# Altium PCB OK6410AV2.PcbDoc (part 4 of 4)
Units mm, origin at the board's own origin, x right, y up, seen from the top; angles counter-clockwise.
Board outline 144.31 x 105.28 mm, 4 copper layers (Top, GND, VCC, Bottom), stack 0.899 mm thick; 254 components, 278 nets, 1261 pads, 740 vias.
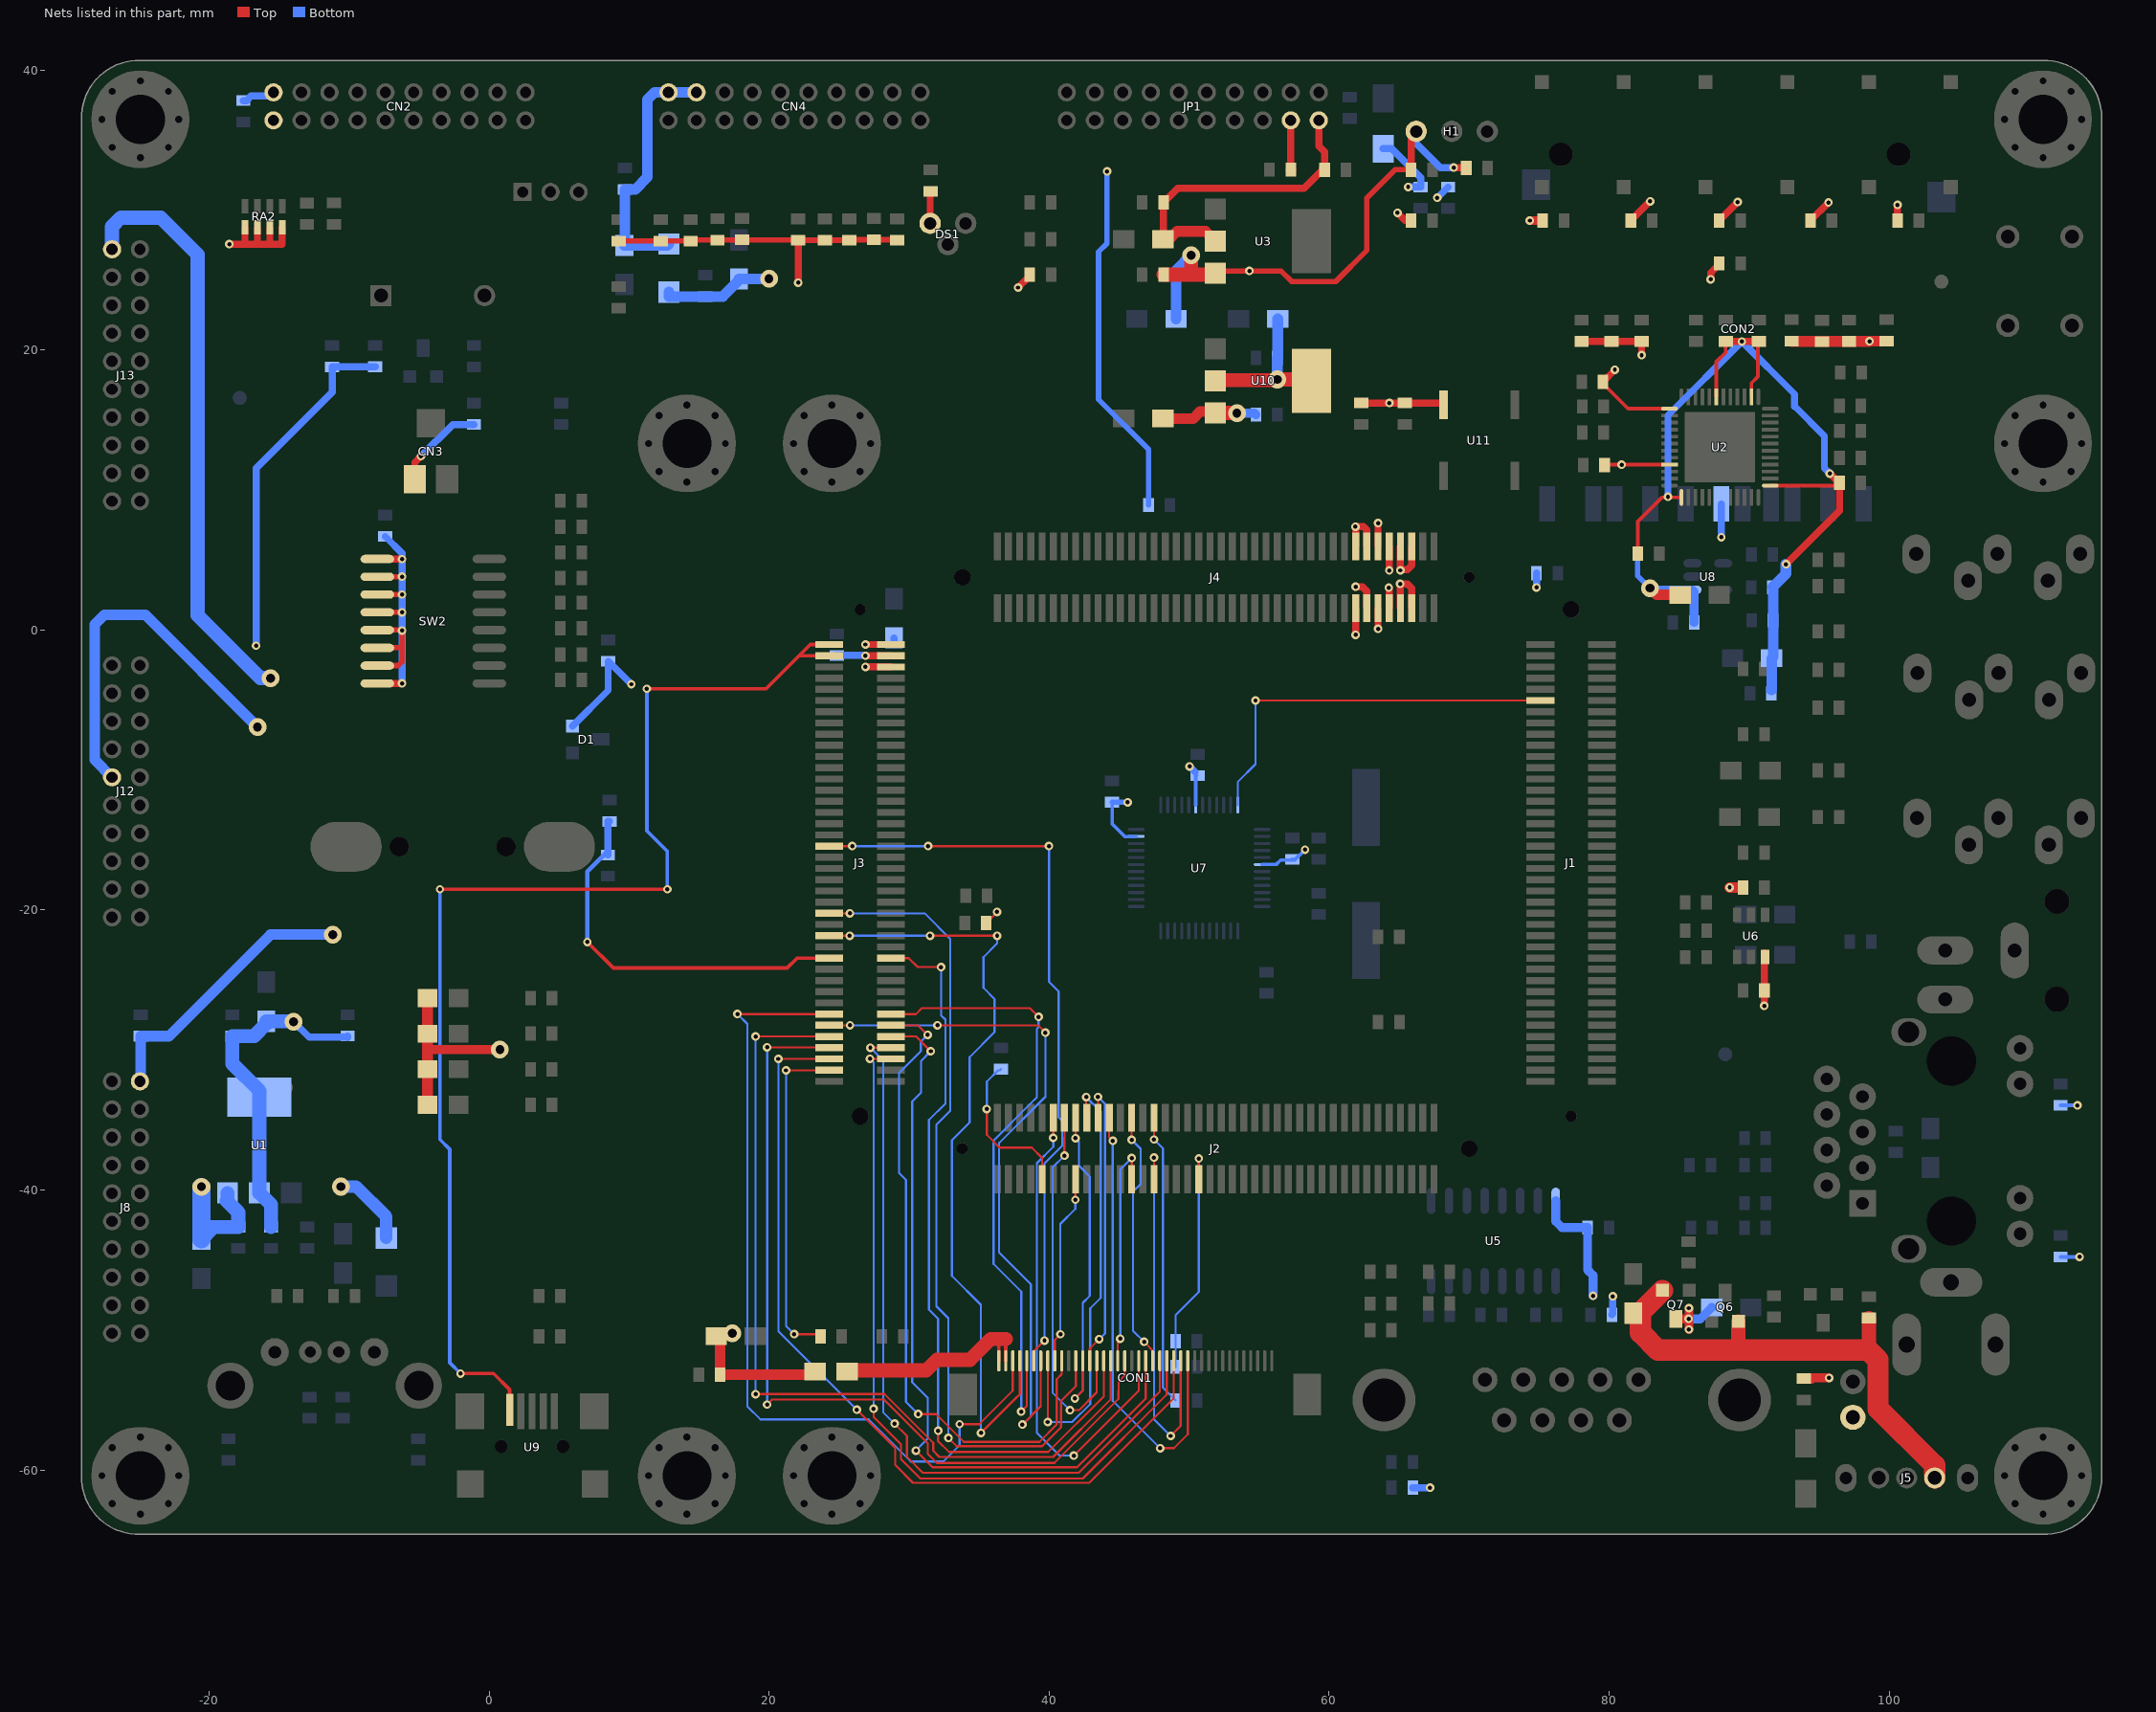
[diagram p6: the nets of this part, all layers, seen from the top]

## Via types
v1: diameter 0.61, hole 0.305, Top to Bottom, tented both sides, 719 vias
v2: diameter 1.27, hole 0.635, Top to Bottom, tented both sides, 21 vias

## Nets (pads, with @x,y where several pads share a name; then routed paths per layer and width w, separated by ;. In a path a pad name is that pad's centre, name@x,y a point inside that pad or via, vN(x,y) a via of type N, cw(c..) or ccw(c..) an arc to the next point about the centre after c; other vN are vias at no path point) (continued)
VBUS: J3.77 J3.79 U9.1 | length 88.4
  Top w0.254: v1(-3.522,-18.512) v1(12.721,-18.512) ; v1(-2.052,-53.111) 0.31,-53.111 1.456,-54.257 U9.1@1.456,-55.809 ; v1(11.258,-4.194) 16.088,-4.194 16.089,-4.195 19.773,-4.195 22.137,-1.831 ; J3.77@24.289,-1.831 22.137,-1.831 ; J3.79@24.289,-1.031 22.937,-1.031 22.137,-1.831
  Bottom w0.254: v1(-3.522,-18.512) -3.522,-36.396 -2.824,-37.094 -2.824,-52.339 v1(-2.052,-53.111) ; v1(11.258,-4.194) 11.258,-14.346 12.721,-15.809 v1(12.721,-18.512)
VCLK: C3.1 J2.43 R66.2 | length 17.1
  Top w0.152: J2.43@50.689,-39.231 v1(50.689,-37.743)
  Bottom w0.152: R66.2@49.037,-52.622 49.037,-50.813 C3.1@49.03,-50.805 49.03,-48.937 50.689,-47.279 v1(50.689,-37.743)
VD0: CON1.3 J3.13 | length 60.6
  Top w0.152: v1(17.734,-27.431) J3.13@24.289,-27.431 ; v1(33.595,-56.725) 35,-56.725 37.396,-54.329 CON1.3@37.396,-52.199
  Bottom w0.152: v1(17.734,-27.431) 18.44,-28.137 18.44,-55.457 19.372,-56.39 27.111,-56.39 30.111,-59.389 32.438,-59.389 33.595,-58.232 v1(33.595,-56.725)
VD1: CON1.4 J3.27 | length 56.7
  Top w0.152: J3.27@24.289,-21.831 25.671,-21.831 v1(25.747,-21.833) ; v1(31.486,-21.833) 36.139,-21.833 v1(36.281,-21.833) ; v1(35.122,-57.357) 37.586,-54.894 37.896,-54.584 CON1.4@37.896,-52.199
  Bottom w0.152: v1(25.747,-21.833) v1(31.486,-21.833) ; v1(35.122,-57.357) 35.122,-48.203 33.045,-46.125 33.045,-36.435 34.307,-35.173 34.307,-30.502 36.095,-28.714 36.095,-26.357 35.299,-25.56 35.299,-23.366 36.281,-22.384 v1(36.281,-21.833)
VD2: CON1.5 J3.14 | length 45.1
  Top w0.152: J3.14@28.689,-27.431 30.478,-27.431 30.903,-27.006 38.619,-27.006 v1(39.24,-27.627) ; v1(38.003,-55.823) 38.396,-55.43 CON1.5@38.396,-52.199
  Bottom w0.152: v1(38.003,-55.823) 38.003,-47.258 36.027,-45.282 36.027,-36.468 38.733,-33.762 39.114,-33.381 39.114,-28.489 39.24,-28.363 v1(39.24,-27.627)
VD3: CON1.6 J3.43 | length 53.7
  Top w0.152: J3.43@24.289,-15.431 v1(25.933,-15.431) ; v1(31.345,-15.431) v1(39.984,-15.431) ; CON1.6@38.896,-52.199 38.896,-51.93 38.913,-51.912 38.913,-51.503 v1(39.663,-50.753)
  Bottom w0.152: v1(25.933,-15.431) v1(31.345,-15.431) ; v1(39.663,-50.753) 39.663,-38.093 40.921,-36.835 40.921,-35.047 40.668,-34.795 40.668,-25.809 39.984,-25.125 v1(39.984,-15.431)
VD4: CON1.7 J3.11 | length 51.3
  Top w0.152: J3.11@24.289,-28.231 v1@25.768,-28.231 ; v1(32.017,-28.23) 39.205,-28.23 v1(39.727,-28.752) ; v1(38.089,-56.758) 39.396,-55.451 CON1.7@39.396,-52.199
  Bottom w0.152: v1(25.769,-28.23) v1(32.017,-28.23) ; v1(38.089,-56.758) 38.684,-56.163 38.684,-46.725 36.425,-44.466 36.425,-36.633 39.727,-33.331 v1(39.727,-28.752)
VD5: CON1.8 J2.64 | length 32.2
  Top w0.152: v1(39.896,-56.572) CON1.8@39.896,-52.199 ; v1(42.642,-33.359) 42.642,-34.831 42.642,-34.878 J2.64@42.689,-34.831
  Bottom w0.152: v1(39.896,-56.572) 41.635,-56.572 42.92,-55.287 42.92,-48.462 43.677,-47.706 43.677,-34.393 v1(42.642,-33.359)
VD6: CON1.9 J2.65 | length 14.2
  Top w0.152: CON1.9@40.396,-52.199 40.396,-50.703 v1(40.798,-50.301) ; v1(41.871,-40.695) 41.871,-39.231 41.871,-38.935 41.889,-38.953 J2.65@41.889,-39.231
  Bottom w0.152: v1(40.798,-50.301) 40.798,-42.425 41.871,-41.351 v1(41.871,-40.695)
VD7: CON1.10 J3.12 | length 47.3
  Top w0.152: J3.12@28.689,-28.231 30.628,-28.231 v1(31.314,-28.917) ; v1(30.639,-56.006) 31.919,-56.006 33.903,-57.989 39.297,-57.989 40.536,-56.75 40.536,-53.511 40.896,-53.151 CON1.10@40.896,-52.199
  Bottom w0.152: v1(30.639,-56.006) 29.765,-55.132 29.765,-39.278 29.27,-38.782 29.27,-31.645 30.834,-30.081 30.834,-29.397 v1(31.314,-28.917)
VD8: CON1.12 J3.31 | length 59.8
  Top w0.152: J3.31@24.289,-20.231 24.785,-20.231 v1(25.762,-20.23) ; v1(32.801,-57.71) 33.39,-58.299 39.494,-58.299 40.842,-56.951 40.842,-55.067 41.896,-54.014 CON1.12@41.896,-52.199
  Bottom w0.152: v1(25.762,-20.23) 31.095,-20.23 32.929,-22.064 32.929,-34.336 31.94,-35.325 31.94,-48.297 32.801,-49.158 v1(32.801,-57.71)
VD9: CON1.13 J2.66 | length 24.4
  Top w0.152: v1(41.833,-54.891) 42.396,-54.328 CON1.13@42.396,-52.199 ; v1(41.881,-36.301) 41.881,-34.831 41.881,-34.54 J2.66@41.889,-34.831
  Bottom w0.152: v1(41.833,-54.891) 42.397,-54.327 42.397,-48.056 42.895,-47.558 42.895,-39.031 42.122,-38.259 42.122,-36.542 v1(41.881,-36.301)
VD10: CON1.14 J2.62 | length 21
  Top w0.152: CON1.14@42.896,-52.199 42.896,-51.33 v1(43.574,-50.652) ; J2.62@43.489,-34.831 v1(43.489,-33.347)
  Bottom w0.152: v1(43.489,-33.347) 43.982,-33.84 43.982,-50.244 v1(43.574,-50.652)
VD11: CON1.15 J2.68 | length 26.5
  Top w0.152: v1(41.088,-37.544) J2.68@41.089,-34.831 J2.68@41.089,-34.831 ; v1(41.485,-55.727) 42.12,-55.727 43.396,-54.451 CON1.15@43.396,-52.199
  Bottom w0.152: v1(41.088,-37.544) 40.237,-38.395 40.237,-54.478 v1(41.485,-55.727)
VD12: CON1.16 J3.24 | length 54.9
  Top w0.152: J3.24@28.689,-23.431 29.958,-23.431 30.601,-24.073 v1(32.272,-24.073) ; v1(32.063,-57.197) 32.063,-57.936 32.844,-58.717 39.925,-58.717 43.896,-54.747 CON1.16@43.896,-52.199
  Bottom w0.152: v1(32.063,-57.197) 32.063,-49.188 31.416,-48.542 31.416,-34.988 32.586,-33.818 32.586,-27.829 32.272,-27.515 v1(32.272,-24.073)
VD13: CON1.17 J3.9 | length 62.8
  Top w0.152: v1(19.023,-54.581) 28.236,-54.581 31.714,-58.058 31.714,-58.627 32.151,-59.064 40.273,-59.064 44.396,-54.942 CON1.17@44.396,-52.199 ; v1(19.023,-29.03) 21.181,-29.03 ; 21.181,-29.031 J3.9@24.289,-29.031
  Bottom w0.152: v1(19.023,-54.581) v1(19.023,-29.03)
VD14: CON1.18 J2.55 | length 16.4
  Top w0.152: CON1.18@44.896,-52.199 44.896,-50.801 v1(45.078,-50.619) ; J2.55@45.889,-39.231 45.898,-39.24 45.898,-39.231 v1(45.898,-37.71)
  Bottom w0.152: v1(45.078,-50.619) 45.078,-38.53 v1(45.898,-37.71)
VD15: CON1.19 J3.7 | length 62.6
  Top w0.152: v1(19.851,-29.803) 24.26,-29.803 J3.7@24.289,-29.831 ; v1(19.853,-55.325) 20.22,-54.958 28.182,-54.958 31.325,-58.102 31.325,-58.838 31.988,-59.501 40.362,-59.501 44.952,-54.911 44.952,-54.359 44.956,-54.355 44.956,-53.68 45.396,-53.24 CON1.19@45.396,-52.199
  Bottom w0.152: v1(19.851,-29.803) 19.767,-29.719 19.853,-29.719 v1(19.853,-55.325)
VD16: CON1.21 J2.70 | length 35
  Top w0.152: v1(40.29,-36.269) J2.70@40.289,-34.831 ; v1(41.759,-58.97) 46.396,-54.334 CON1.21@46.396,-52.199
  Bottom w0.152: v1(40.29,-36.269) 40.29,-36.907 39.118,-38.079 39.118,-57.347 40.741,-58.97 v1(41.759,-58.97)
VD17: CON1.22 J3.10 | length 54.8
  Top w0.152: J3.10@28.689,-29.031 30.483,-29.031 v1(31.535,-30.082) ; v1(30.474,-58.615) 31.665,-59.806 41.993,-59.806 46.896,-54.903 CON1.22@46.896,-52.199
  Bottom w0.152: v1(30.474,-58.615) 31.328,-57.761 31.328,-54.853 30.211,-53.736 30.211,-33.677 30.842,-33.045 30.842,-30.775 v1(31.535,-30.082)
VD18: CON1.23 J2.56 | length 18.4
  Top w0.152: v1(45.888,-36.412) 45.888,-34.832 J2.56@45.889,-34.831 ; v1(46.782,-50.842) 47.396,-51.455 CON1.23@47.396,-52.199
  Bottom w0.152: v1(45.888,-36.412) 46.532,-37.055 46.532,-39.562 45.995,-40.099 45.995,-50.054 v1(46.782,-50.842)
VD19: CON1.24 J3.8 | length 54.9
  Top w0.152: v1@27.222,-29.831 J3.8@28.689,-29.831 ; v1(28.953,-56.687) 29.832,-57.566 29.832,-59.046 30.989,-60.204 42.087,-60.204 47.896,-54.396 CON1.24@47.896,-52.199
  Bottom w0.152: v1(27.222,-29.83) 28.139,-30.747 28.136,-49.226 28.136,-55.871 v1(28.953,-56.687)
VD20: CON1.25 J3.6 | length 55.5
  Top w0.152: v1(27.199,-30.628) 27.199,-30.631 J3.6@28.689,-30.631 ; v1(27.457,-55.625) 27.457,-56.212 29.403,-58.157 29.403,-59.219 30.789,-60.606 42.394,-60.606 48.396,-54.605 CON1.25@48.396,-52.199
  Bottom w0.152: v1(27.199,-30.628) 27.461,-30.89 v1(27.457,-55.625)
VD21: CON1.26 J3.5 | length 61.7
  Top w0.152: v1(20.651,-30.631) J3.5@23.977,-30.631 ; J3.5@23.978,-30.631 J3.5@24.289,-30.631 ; v1(26.257,-55.688) 28.992,-58.424 28.992,-59.634 30.271,-60.913 42.859,-60.913 48.896,-54.876 CON1.26@48.896,-52.199
  Bottom w0.152: v1(20.651,-30.631) 20.651,-50.082 v1(26.257,-55.688)
VD22: CON1.27 J2.51 | length 27.6
  Top w0.152: J2.51@47.489,-39.231 v1@47.489,-37.682 ; v1(48.675,-57.566) 49.396,-56.845 CON1.27@49.396,-52.199
  Bottom w0.152: v1(47.488,-37.682) 47.49,-53.756 47.49,-56.381 v1(48.675,-57.566)
VD23: CON1.28 J2.60 | length 32.7
  Top w0.152: J2.60@44.289,-34.831 44.284,-34.836 44.284,-36.225 v1(44.541,-36.481) ; v1(47.926,-58.439) 48.907,-58.439 49.896,-57.45 CON1.28@49.896,-52.199
  Bottom w0.152: v1(44.541,-36.481) 44.541,-55.054 v1(47.926,-58.439)
VDD5V: B2.1 C4.1 C5.1 C6.1 C7.1 C8.1 C9.1 C10.1 C13.1 C21.1 C23.1 C27.1 C50.1 C52.1 C64.1 C71.1 C73.1 C92.1 C94.1 H1.3 J3.76 J3.78 J3.80 J8.19 J12.12 J13.20 J16.1 Q7.C R2.2 R14.1 R27.2 R40.2 R76.1 U1.1 U3.1 U5.16 U8.1 U10.1 | length 221.9
  Top w0.152: v2(53.41,15.494) v2@53.41,15.523
  Top w0.381: U3.1@51.87,25.494 52.037,25.662 v1(54.302,25.662) 56.563,25.662 57.326,24.898 60.463,24.898 62.693,27.128 62.693,30.878 64.699,32.884 C7.1@65.857,32.884
  Top w0.508: v1(26.875,-2.631) J3.76@28.689,-2.631 ; v1(26.875,-1.831) J3.78@28.689,-1.831 ; v1(26.875,-1.031) J3.80@28.689,-1.031 ; U10.1@51.871,15.523 U10.1@52.18,15.523 ; C7.1@65.857,32.884 65.857,35.266 H1.3@66.217,35.626 ; v1(68.897,33.04) 68.897,33.019 R40.2@69.793,33.019
  Top w0.635: Q7.C@84.76,-49.2 v1@85.7,-49.2 ; v1(85.7,-49.962) v1@85.7,-49.2 ; v1(85.7,-48.438) v1@85.7,-49.2 ; 94.449,-53.509 94.542,-53.416 v1(95.707,-53.416)
  Top w0.762: v2(17.351,-50.227) 16.436,-50.227 C6.1@16.217,-50.446 16.495,-50.724 C94.1@16.495,-53.192 23.219,-53.192 23.219,-53.029 R14.1@23.275,-52.973 ; C71.1@48.115,15.107 50.285,15.107 50.786,15.608 51.785,15.608 U10.1@51.871,15.523 ; v2(82.914,3) 83.399,2.514 C4.1@85.065,2.514
  Top w1.016: C73.1@48.167,25.402 50.14,25.402 ; v2(50.14,26.777) 50.14,25.402 ; U3.1@51.87,25.494 51.87,25.377 51.845,25.402 50.14,25.402 ; U10.1@52.18,15.523 v2@53.41,15.523
  Bottom w0.381: R27.2@82.042,5.461 82.042,3.871 v2(82.914,3)
  Bottom w0.508: J8.19@-24.95,-32.235 J8.19@-24.948,-32.232 ; v1(-16.656,-1.114) -16.656,11.558 -11.223,16.991 C92.1@-11.223,18.805 -8.158,18.805 R2.2@-8.151,18.812 ; C5.1@24.829,-1.808 26.852,-1.808 v1(26.875,-1.831) ; v1(26.875,-1.031) 28.809,-1.031 28.908,-0.933 C8.1@28.908,-0.556 ; H1.3@66.217,35.626 66.217,34.774 67.95,33.04 v1(68.897,33.04) ; C64.1@80.198,-48.908 80.257,-48.849 v1(80.257,-47.586)
  Bottom w0.635: v2(53.41,15.494) 54.667,15.494 C52.1@54.766,15.395 ; U5.16@76.182,-40.767 76.182,-42.231 76.632,-42.681 C9.1@78.461,-42.681 ; C9.1@78.461,-42.682 78.461,-45.704 78.85,-46.092 v1(78.85,-47.553) ; v2(82.914,3) 83.041,2.873 U8.1@85.949,2.873 86.073,2.749 C10.1@86.073,0.545 ; v1(85.674,-49.2) 86.512,-49.2 C27.1@87.325,-48.387
  Bottom w0.762: J12.12@-26.95,-10.517 -28.194,-9.273 -28.194,0.394 -27.5,1.088 -24.573,1.088 v2(-16.559,-6.925) ; J8.19@-24.948,-32.232 -24.898,-32.183 C13.1@-24.898,-29.008 -22.875,-29.008 -15.618,-21.751 v2(-11.174,-21.751) ; C50.1@49.06,22.228 49.06,25.696 v2(50.14,26.777)
  Bottom w0.889: v2(-10.599,-39.755) -10.598,-39.756 -9.507,-39.756 -7.359,-41.904 B2.1@-7.359,-43.421
  Bottom w1.016: J13.20@-26.95,27.205 -26.95,28.828 -26.311,29.466 -23.474,29.466 -20.824,26.816 -20.824,1.045 -16.348,-3.43 v2(-15.627,-3.43) ; C21.1@-20.562,-43.521 -19.788,-42.747 -19.788,-42.642 C23.1@-17.924,-42.642 -17.924,-41.605 -18.738,-40.79 -18.7,-40.752 U1.1@-18.7,-40.213
  Bottom w1.27: v2(-20.565,-39.76) -20.562,-39.763 C21.1@-20.562,-43.521
VDD18V: C51.1 C53.1 C84.1 JP1.19 U3.3 | length 22.9
  Top w0.508: C51.1@48.166,27.92 C53.1@48.166,30.536 ; C53.1@48.166,30.542 C53.1@48.166,30.536 ; JP1.19@59.257,36.144 59.257,34.58 59.676,34.162 59.676,33.016 C84.1@59.676,32.886 ; C84.1@59.614,32.954 58.215,31.555 49.186,31.555 C53.1@48.166,30.536
  Top w0.762: C51.1@48.115,27.92 48.166,27.92 48.529,27.92 48.555,27.894 49.147,28.486 51.164,28.486 U3.3@51.87,27.78 ; C84.1@59.614,32.954 C84.1@59.676,33.016
VDD33V: B1.1 C15.1 C16.1 C17.1 C22.1 C24.1 C54.1 C55.1 C59.1 C81.1 C83.1 C86.1 C90.1 C91.1 C96.1 C97.1 C98.2 C99.2 C100.2 C101.2 C102.2 C103.2 C104.2 CN2.1 CN2.2 CN3.3 CON2.4 D1.2 D3.A DS1.3 JP1.17 LED1.1 LED2.1 LED3.1 LED4.1 R6.2 R12.1 R15.2 R18.2 R19.2 R20.2 R22.2 R23.2 R24.2 R29.2 R30.2 R31.2 R32.2 R33.2 R36.1 R38.2 R47.1 R48.2 R50.2 R51.2 R58.1 R59.1 R61.1 R74.1 R75.1 R77.1 R78.1 R91.2 R92.2 R93.2 R94.2 R95.2 RA2.5 RA2.6 RA2.7 RA2.8 SW2.9 SW2.10 SW2.11 SW2.12 SW2.13 SW2.14 SW2.15 SW2.16 U1.3 U1.4 U2.1 U2.9 U6.6 U7.23 U7.30 U7.42 U11.4 | length 224.4
  Top w0.152: R12.1@35.497,-20.926 35.497,-20.966 v1(36.275,-20.133) ; R50.2@82.314,20.628 R50.2@82.322,20.354
  Top w0.254: C15.1@79.563,17.746 79.519,17.746 79.471,17.698 81.348,15.821 U2.1@84.31,15.821 ; C59.1@79.667,11.782 79.706,11.821 U2.9@84.31,11.821
  Top w0.381: SW2.15@-8,-2.54 -7.992,-2.532 -6.502,-2.532 -6.235,-2.266 -6.235,-1.245 ; SW2.14@-8,-1.27 -7.975,-1.245 -6.235,-1.245 ; SW2.13@-8,0 -6.489,0 v1(-6.235,-0.036) -6.235,-1.245 ; SW2.12@-8,1.27 v1(-6.235,1.27) ; SW2.11@-8,2.54 v1(-6.235,2.54) ; SW2.10@-8,3.81 v1(-6.235,3.81) ; v1@-6.245,5.08 v1(-6.235,5.07) ; R6.2@9.235,27.794 R29.2@12.239,27.794 ; R29.2@12.239,27.795 14.358,27.795 14.372,27.78 14.386,27.767 14.399,27.78 14.48,27.861 R24.2@16.298,27.861 16.316,27.879 R33.2@18.056,27.879 22.193,27.879 R32.2@22.221,27.851 ; R32.2@22.067,27.851 R32.2@22.221,27.851 ; R22.2@29.14,27.853 29.107,27.886 R20.2@27.482,27.886 25.76,27.886 R18.2@25.727,27.853 23.977,27.853 R30.2@23.974,27.851 R32.2@22.221,27.851
  Top w0.508: v1(-18.577,27.576) -17.451,27.576 ; RA2.5@-17.451,28.766 -17.451,27.576 ; RA2.6@-16.562,28.766 -16.562,27.576 ; RA2.7@-15.673,28.766 -15.673,27.576 ; RA2.8@-14.784,28.766 -14.792,28.758 -14.792,27.576 -15.673,27.576 ; SW2.16@-8,-3.81 -6.438,-3.81 -6.433,-3.805 v1(-6.235,-3.805) ; SW2.9@-8,5.08 v1@-6.245,5.08 ; CN3.3@-5.316,10.776 -5.316,11.982 v1(-4.877,12.421) ; R32.2@22.067,27.851 22.067,24.812 v1(22.073,24.812) ; R22.2@29.14,27.853 R22.2@29.171,27.884 ; DS1.3@31.495,29.058 31.495,31.317 C96.1@31.524,31.345 ; v1(37.77,24.469) 38.576,25.274 38.576,25.362 R38.2@38.616,25.403 ; C54.1@57.257,32.889 JP1.17@57.257,36.144 ; R61.1@62.292,16.222 62.289,16.219 v1(64.301,16.219) C81.1@65.409,16.221 68.039,16.221 U11.4@68.169,16.091 ; v1(64.88,29.803) 65.425,29.258 R58.1@65.858,29.258 ; R91.2@78.03,20.627 R92.2@80.168,20.628 ; C15.1@79.563,17.746 v1(80.408,18.591) ; R92.2@80.168,20.628 R50.2@82.314,20.628 ; R74.1@81.555,29.259 v1(82.924,30.628) ; v1(82.322,19.648) R50.2@82.322,20.354 ; v1(87.251,25.053) 87.251,25.526 87.803,26.078 87.803,26.131 C16.1@87.865,26.192 ; R75.1@87.864,29.259 v1(89.182,30.577) ; v1(91.085,-26.847) 91.09,-26.847 C100.2@91.09,-25.739 91.09,-23.047 91.133,-23.09 U6.6@91.133,-23.35 ; R77.1@94.385,29.259 v1(95.67,30.544) ; v1(98.596,20.628) v1@98.617,20.65 ; R78.1@100.605,29.259 v1(100.605,30.369) ; -17.451,27.576 -16.562,27.576 ; -16.562,27.576 -15.673,27.576
  Top w0.635: -4.408,-29.972 v2(0.762,-29.972) ; v1(74.336,29.254) 74.341,29.259 R59.1@75.251,29.259
  Top w0.762: LED4.1@-4.408,-33.909 LED3.1@-4.408,-31.369 -4.408,-29.972 LED2.1@-4.408,-28.829 LED1.1@-4.408,-26.289 ; v1(88.611,-18.386) 88.611,-18.389 R36.1@89.566,-18.389 ; R94.2@93.047,20.627 R95.2@97.141,20.627 v1(98.596,20.628) v1(98.596,20.628) ; v1@98.617,20.65 C102.2@99.833,20.65
  Bottom w0.152: C103.2@50.43,-10.141 50.464,-10.176 50.464,-10.415 50.575,-10.415 C103.2@50.592,-10.398
  Bottom w0.254: C99.2@44.493,-12.297 44.493,-13.845 45.394,-14.745 U7.23@46.214,-14.745 ; U7.30@50.464,-12.495 C103.2@50.464,-10.415 ; U7.42@55.214,-16.745 56.212,-16.745 56.532,-16.425 57.326,-16.425 C104.2@57.331,-16.42 ; C104.2@57.369,-16.382 C104.2@57.331,-16.42 ; v1(58.274,-15.686) 57.54,-16.42 C104.2@57.331,-16.42 ; R47.1@112.247,-44.777 v1(113.606,-44.778) ; R48.2@112.247,-33.952 v1(113.456,-33.952)
  Bottom w0.381: v1(44.13,32.769) 44.13,27.628 43.526,27.023 43.526,16.477 47.102,12.901 R31.2@47.102,8.932 ; C99.2@44.493,-12.297 v1(45.597,-12.297)
  Bottom w0.508: C101.2@-17.574,37.823 -17.338,37.823 -17.017,38.144 CN2.2@-15.413,38.144 ; v2(-13.976,-27.981) -12.873,-29.083 C98.2@-10.12,-29.083 ; C98.2@-10.12,-29.001 C98.2@-10.12,-29.083 ; C86.1@-7.435,6.692 -6.235,5.492 v1(-6.235,5.07) v1(-6.235,3.81) v1(-6.235,2.54) v1(-6.235,-0.036) v1(-6.235,-3.805) ; v1(-4.877,12.421) -2.612,14.685 C83.1@-1.098,14.685 ; D1.2@5.944,-6.858 8.492,-4.31 C90.1@8.492,-2.225 8.506,-2.225 v1(10.147,-3.866) ; v1(50.032,-9.743) C103.2@50.43,-10.141 ; D3.A@63.856,34.388 64.449,34.388 66.537,32.3 C17.1@66.537,31.655 v1(65.642,31.655) ; R15.2@65.976,-61.261 v1(67.203,-61.26) v1(67.203,-61.26) ; v1(67.72,30.893) 67.741,30.893 R19.2@68.495,31.647 ; v1(74.803,3.048) 74.811,3.056 R51.2@74.811,4.075 ; v1(88.011,6.629) CON2.4@88.011,9.017 ; C98.2@-10.12,-29.083 -10.12,-29.098 -10.105,-29.083 C98.2@-10.12,-29.083
  Bottom w0.762: B1.1@12.826,24.147 12.84,24.133 12.84,23.827 C97.1@15.425,23.827 16.676,23.827 C55.1@17.926,25.077 ; C55.1@17.831,25.077 C55.1@17.926,25.077 ; v2(19.98,25.104) 19.953,25.077 C55.1@17.926,25.077
  Bottom w1.016: C24.1@-15.585,-42.642 -15.585,-41.043 U1.3@-16.414,-40.213 U1.4@-16.414,-33.355 -16.414,-32.914 -18.361,-30.968 C91.1@-18.361,-29.007 -16.808,-29.007 -15.922,-28.121 C22.1@-15.922,-27.944 -14.012,-27.944 v2(-13.976,-27.981)
  other v1: 80.899,11.811
VDD_AC97: C11.1 C60.1 C61.1 C62.1 C65.1 C66.1 C68.1 R28.1 U2.13 U2.25 U2.38 U2.43 | length 64.9
  Top w0.254: C60.1@82.05,5.472 82.05,7.755 83.766,9.471 U2.13@85.16,9.471 ; U2.43@87.66,16.671 87.66,19.163 88.313,19.815 88.313,20.592 C65.1@88.341,20.62 ; U2.38@90.16,16.671 90.16,17.656 90.623,18.119 C62.1@90.623,20.62 ; U2.25@91.51,10.321 96.264,10.321 96.386,10.444 C61.1@96.457,10.514
  Top w0.381: C61.1@96.386,10.444 C61.1@96.449,10.381
  Top w0.508: C65.1@88.338,20.622 C65.1@88.341,20.62 90.623,20.62 C62.1@90.705,20.62 ; v1(92.634,4.699) 96.449,8.514 C61.1@96.449,10.381 ; v1(95.758,11.176) 96.42,10.514 C61.1@96.457,10.514
  Bottom w0.508: v1(84.201,9.525) 84.201,15.339 v1(89.482,20.62) 93.256,16.845 93.256,15.989 95.377,13.868 95.377,11.557 v1(95.758,11.176)
  Bottom w0.762: C66.1@91.587,-4.284 91.61,-4.262 91.61,-2.036 91.632,-2.013 91.715,-1.931 91.715,0.693 R28.1@91.715,3.059 ; R28.1@91.688,3.086 92.628,4.026 v1@92.628,4.705
VDD_IO: C72.1 C74.1 J4.65 J4.66 J4.67 J4.68 J4.69 J4.70 J4.71 J4.72 J4.73 J4.74 J4.75 J4.76 U10.3 U10.4 | length 33.7
  Top w0.152: v2@56.258,17.85 56.29,17.809 v2(56.293,17.907) ; U10.4@58.729,17.809 U10.4@58.932,17.611 ; v1(64.254,3.028) v1@64.289,3.028 ; v1(65.07,3.299) v1@65.089,3.299 ; v1(65.09,4.267) v1@65.133,4.311
  Top w0.508: v1(61.885,3.101) 62.372,3.101 62.69,2.784 J4.68@62.69,1.569 ; v1(61.889,-0.34) J4.66@61.89,1.569 ; J4.65@61.895,5.964 J4.65@61.89,5.969 61.89,7.38 v1(61.879,7.391) 62.46,7.391 62.69,7.162 J4.67@62.69,5.969 ; v1(63.49,0.084) J4.70@63.49,1.569 ; J4.69@63.49,5.969 v1(63.49,7.638) ; J4.72@64.29,1.569 v1@64.29,3.028 ; v1(64.29,4.26) J4.71@64.29,5.969 ; J4.74@65.09,1.569 65.09,3.299 65.586,3.299 65.89,2.996 J4.76@65.89,1.569 ; v1(65.09,4.267) J4.73@65.09,5.969 ; v1@65.133,4.311 65.576,4.311 65.89,4.624 J4.75@65.89,5.969
  Top w0.635: U10.3@51.871,17.809 U10.3@52.098,17.85 ; U10.4@58.728,17.907 U10.4@58.729,17.809
  Top w1.016: U10.3@52.098,17.85 v2@56.258,17.85 ; v2(56.293,17.907) U10.4@58.728,17.907
  Bottom w0.762: v2(56.293,17.907) 56.293,19.442 C74.1@56.295,19.444 56.327,19.476 C72.1@56.327,22.229
VDD_LCD: CON1.1 CON1.2 R14.2 | length 15.4
  Top w0.254: CON1.1@36.396,-52.199 36.396,-50.644 ; CON1.2@36.896,-52.199 36.896,-50.644
  Top w1.016: R14.2@25.561,-52.973 25.642,-52.892 31.212,-52.892 31.981,-52.123 34.351,-52.123 35.83,-50.644 36.396,-50.644 36.896,-50.644
VDD_RTC: C34.1 J3.23 R17.1 | length 28
  Top w0.254: v1(7.007,-22.283) 8.866,-24.143 10.113,-24.143 21.279,-24.142 21.99,-23.431 J3.23@24.289,-23.431
  Bottom w0.305: v1(7.007,-22.283) 7.007,-17.244 8.328,-15.923 8.338,-15.923 C34.1@8.475,-16.061
  Bottom w0.508: C34.1@8.475,-16.061 8.475,-13.667 R17.1@8.583,-13.667
VDD_WIFI: B1.2 C25.1 C26.1 CN4.2 CN4.4 | length 18.5
  Bottom w0.762: B1.2@12.826,27.576 12.728,27.478 C25.1@9.651,27.478 9.679,27.506 C26.1@9.679,31.48 10.429,31.48 11.302,32.353 11.302,37.903 11.812,38.412 CN4.2@12.804,38.412 CN4.4@14.804,38.412
VDEN: J3.3 R4.2 | length 24.1
  Top w0.152: v1(21.199,-31.451) 22.712,-31.451 ; v1(21.781,-50.294) 23.504,-50.294 R4.2@23.658,-50.447 ; 22.713,-31.45 J3.3@24.289,-31.45 ; J3.3@24.29,-31.45 J3.3@24.289,-31.431
  Bottom w0.152: v1(21.199,-31.451) 21.199,-49.712 v1(21.781,-50.294)
VIN+: C31.1 J5.1 Q6.E Q7.E R79.1 | length 36
  Top w1.016: 89.23,-51.384 Q6.E@89.23,-49.378 ; 98.566,-51.486 R79.1@98.566,-49.141
  Top w1.524: Q7.E@83.807,-47.168 82.245,-48.73 82.245,-50.19 83.49,-51.435 89.281,-51.435 ; 89.23,-51.384 89.281,-51.435 ; J5.1@103.255,-60.565 103.255,-59.668 99.212,-55.626 99.212,-52.132 98.566,-51.486 98.515,-51.435 89.281,-51.435
VSYNC: J2.52 R64.2 | length 20.9
  Top w0.152: v1@47.489,-36.388 J2.52@47.489,-34.831
  Bottom w0.152: v1(47.488,-36.389) 48.116,-37.016 48.116,-54.118 R64.2@49.037,-55.04
WEN: J1.12 U7.36 | length 28.3
  Top w0.152: v1(54.739,-5.03) 63.544,-5.03 ; 63.545,-5.031 J1.12@75.088,-5.031
  Bottom w0.152: U7.36@53.464,-12.495 53.464,-10.856 54.739,-9.581 v1(54.739,-5.03)
XNRSTOUT: J2.71 R90.1 | length 11.3
  Top w0.152: v1(35.539,-34.215) 35.539,-36.054 36.458,-36.972 38.763,-36.972 39.489,-37.699 J2.71@39.489,-39.231
  Bottom w0.152: v1(35.539,-34.215) 35.539,-32.257 36.347,-31.449 36.471,-31.449 R90.1@36.557,-31.362
pads on no net: BAT1.3 BAT1.4 CN2.17 CN2.19 CN4.10 CN4.12 CN4.14 CN4.16 CN4.17 CN4.19 CON1.41 CON1.42 CON2.3@76.556,33.985 CON2.3@100.686,33.985 D2.2 J1.3 J1.4 J1.5 J1.6 J1.7 J1.8 J1.10 J1.11 J1.13 J1.14 J1.20 J1.23 J1.25 J1.46 J1.50 J1.56 J1.81 J1.82 J2.3 J2.9 J2.13 J2.15 J2.19 J2.21 J2.25 J2.26 J2.27 J2.29 J2.31 J2.34 J2.36 J2.37 J2.40 J2.59 J2.81 J2.82 J3.17 J3.18 J3.21 J3.28 J3.44 J3.63 J3.64 J3.66 J3.68 J3.70 J3.71 J3.72 J3.74 J3.81 J3.82 J4.9 J4.10 J4.11 J4.12 J4.13 J4.14 J4.22 J4.23 J4.25 J4.26 J4.27 J4.28 J4.29 J4.37 J4.38 J4.39 J4.40 J4.41 J4.43 J4.44 J4.45 J4.47 J4.48 J4.81 J4.82 J5.3 J5.4 J5.5 J10.7 J10.8 J10.15 J10.16 P1.4 P1.9 TV1.3 TV1.4 U2.12 U2.14 U2.15 U2.16 U2.17 U2.19 U2.20 U2.22 U2.29 U2.30 U2.31 U2.33 U2.35 U2.36 U2.37 U2.44 U2.46 U2.47 U2.48 U3.4 U7.19 U7.20 U7.21 U7.46 U9.9 U9.10 U9.11

## Polygon pours and split planes (outlines as drawn)
GND on Bottom "Keep-Out Layer-No Net" (solid, remove dead copper, pour order 6): -29.21,-64.643 115.189,-64.643 115.189,40.767 114.935,40.513 -28.956,40.513 -28.956,-64.389 -29.21,-64.643
GND on Top "Keep-Out Layer-No Net" (solid, remove dead copper, pour order 4): -29.108,40.665 -29.21,40.564 -29.21,-64.643 115.164,-64.643 115.189,-64.668 115.214,-64.643 115.214,40.767 -29.21,40.767 -29.21,40.513 -29.21,40.386
GND on GND (split plane): 114.926,9.572 114.899,9.613 114.857,9.641 114.807,9.651 107.317,9.651 107.317,17.012 114.807,17.012 114.857,17.022 114.899,17.05 114.926,17.09
GND on GND (split plane): 111.392,40.421 111.662,40.392 111.93,40.344 112.193,40.277 112.451,40.191 112.703,40.087 112.946,39.965 113.18,39.826 113.403,39.671 113.615,39.501 113.814,39.315 113.999,39.116 114.17,38.904 114.325,38.681 114.464,38.447 114.586,38.204 114.678,37.982 114.678,17.271 107.187,17.271 107.138,17.261 107.096,17.233 107.067,17.191 107.058,17.141 107.058,9.521 107.067,9.472 107.096,9.43 107.138,9.402 107.187,9.392 114.678,9.392 114.678,-61.891 114.586,-62.113 114.464,-62.356 114.325,-62.59 114.17,-62.813 113.999,-63.025 113.814,-63.224 113.615,-63.41 113.403,-63.58 113.18,-63.735 112.946,-63.874 112.703,-63.996 112.486,-64.086 -26.429,-64.086 -26.645,-63.996 -26.888,-63.874 -27.122,-63.735 -27.345,-63.58 -27.557,-63.41 -27.756,-63.224 -27.941,-63.025 -28.112,-62.813 -28.267,-62.59 -28.406,-62.356 -28.528,-62.113 -28.632,-61.862 -28.718,-61.604 -28.785,-61.34 -28.833,-61.073 -28.862,-60.802 -28.872,-60.53 -28.868,-60.407 -28.869,-60.407 -28.868,-60.399 -28.868,36.49 -28.869,36.498 -28.868,36.498 -28.872,36.621 -28.862,36.893 -28.833,37.164 -28.785,37.431 -28.718,37.695 -28.632,37.953 -28.528,38.204 -28.406,38.447 -28.267,38.681 -28.112,38.904 -27.942,39.116 -27.756,39.315 -27.557,39.501 -27.345,39.671 -27.122,39.826 -26.888,39.965 -26.645,40.087 -26.394,40.191 -26.136,40.277 -25.872,40.344 -25.604,40.392 -25.334,40.421 -25.062,40.431 -24.939,40.427 -24.939,40.428 -24.931,40.427 110.977,40.431 110.99,40.429 111.004,40.43 111.018,40.428 111.025,40.429 111.025,40.428 111.12,40.431
no net on VCC (split plane): 111.392,40.421 111.662,40.392 111.93,40.344 112.193,40.277 112.451,40.191 112.703,40.087 112.946,39.965 113.18,39.826 113.403,39.671 113.615,39.501 113.814,39.315 113.999,39.116 114.17,38.904 114.325,38.681 114.464,38.447 114.586,38.204 114.69,37.953 114.776,37.695 114.843,37.431 114.891,37.164 114.92,36.893 114.929,36.636 114.928,36.625 114.926,36.494 114.926,36.492 114.926,36.49 114.926,32.729 114.899,32.77 114.857,32.798 114.807,32.808 107.317,32.808 107.317,40.298 107.307,40.348 107.279,40.39 107.237,40.418 107.187,40.428 6.512,40.428 110.977,40.431 110.99,40.429 111.004,40.43 111.018,40.428 111.025,40.429 111.025,40.428 111.12,40.431
no net on VCC (split plane): 114.926,9.572 114.899,9.613 114.857,9.641 114.807,9.651 107.37,9.651 107.37,17.012 114.807,17.012 114.857,17.022 114.899,17.05 114.926,17.09
no net on VCC (split plane): 114.926,-60.399 114.926,-60.401 114.926,-60.403 114.928,-60.534 114.929,-60.545 114.92,-60.802 114.891,-61.073 114.843,-61.34 114.776,-61.604 114.69,-61.862 114.586,-62.113 114.464,-62.356 114.325,-62.59 114.17,-62.813 113.999,-63.025 113.814,-63.224 113.615,-63.41 113.403,-63.58 113.18,-63.735 112.946,-63.874 112.703,-63.996 112.451,-64.1 112.193,-64.186 111.93,-64.253 111.662,-64.301 111.392,-64.33 111.12,-64.34 110.997,-64.336 110.997,-64.337 110.989,-64.336 10.354,-64.336 10.361,-64.335 10.403,-64.307 10.431,-64.265 10.441,-64.215 10.441,-56.802 28.159,-56.802 28.159,-64.176 28.169,-64.225 28.197,-64.267 28.239,-64.295 28.289,-64.305 107.187,-64.305 107.237,-64.295 107.279,-64.267 107.307,-64.225 107.317,-64.176 107.317,-56.724 114.807,-56.724 114.857,-56.715 114.899,-56.687 114.926,-56.646
VDD_IO on VCC (split plane): 60.414,8.56 60.423,8.51 60.451,8.468 60.493,8.44 60.543,8.43 66.207,8.43 66.207,-1.321 59.91,-1.321 59.91,5.034 59.9,5.084 59.872,5.126 59.83,5.154 59.781,5.164 55.191,5.164 55.191,20.321 60.414,20.321
VDD33V on VCC (split plane): 107.058,32.678 107.067,32.629 107.096,32.587 107.138,32.559 107.187,32.549 114.678,32.549 114.678,17.271 107.241,17.271 107.191,17.261 107.149,17.233 107.121,17.191 107.111,17.141 107.111,9.521 107.121,9.472 107.149,9.43 107.191,9.402 107.241,9.392 114.678,9.392 114.678,-56.466 107.187,-56.466 107.138,-56.475 107.096,-56.503 107.067,-56.545 107.058,-56.595 107.058,-64.046 28.418,-64.046 28.418,-56.672 28.408,-56.623 28.38,-56.581 28.338,-56.553 28.289,-56.543 10.311,-56.543 10.262,-56.553 10.22,-56.581 10.192,-56.623 10.182,-56.672 10.182,-64.086 -20.987,-64.086 -20.987,-56.595 -20.997,-56.545 -21.025,-56.503 -21.067,-56.475 -21.117,-56.466 -28.607,-56.466 -28.607,32.549 -21.117,32.549 -21.067,32.559 -21.025,32.587 -20.997,32.629 -20.987,32.678 -20.987,40.169 107.058,40.169
VDD5V on VCC (split plane): 54.741,-2.578 54.751,-2.628 54.779,-2.67 54.821,-2.698 54.871,-2.708 76.934,-2.708 76.984,-2.698 77.026,-2.67 77.054,-2.628 77.064,-2.578 77.064,4.798 89.204,4.798 89.204,-8.68 15.313,-8.68 15.313,-2.658 15.303,-2.609 15.275,-2.567 15.233,-2.538 15.184,-2.529 -5.241,-2.529 -5.29,-2.538 -5.333,-2.567 -5.361,-2.609 -5.37,-2.658 -5.37,-38.458 -5.361,-38.508 -5.333,-38.55 -5.29,-38.578 -5.241,-38.588 70.574,-38.588 70.574,-46.529 70.584,-46.579 70.612,-46.621 70.654,-46.649 70.703,-46.659 105.146,-46.659 105.145,-61.938 94.694,-61.938 94.694,-52.397 94.684,-52.347 94.656,-52.305 94.614,-52.277 94.564,-52.267 64.336,-52.267 64.336,-46.552 64.326,-46.503 64.298,-46.461 64.256,-46.433 64.206,-46.423 19.76,-46.423 19.711,-46.433 19.669,-46.461 19.64,-46.503 19.631,-46.552 19.631,-51.635 15.612,-51.635 15.612,-46.662 15.602,-46.612 15.574,-46.57 15.532,-46.542 15.483,-46.532 -21.644,-46.532 -21.644,-38.461 -12.449,-38.461 -12.4,-38.451 -12.358,-38.423 -12.33,-38.381 -12.32,-38.331 -12.32,-8.8 -12.33,-8.75 -12.358,-8.708 -12.4,-8.68 -12.449,-8.67 -17.842,-8.67 -17.842,2.468 29.593,2.468 29.593,-0.754 29.603,-0.804 29.631,-0.846 29.673,-0.874 29.723,-0.884 42.021,-0.884 42.07,-0.874 42.112,-0.846 42.14,-0.804 42.15,-0.754 42.15,27.964 54.741,27.964
no net on VCC (split plane): -24.939,40.427 -24.939,40.428 -24.931,40.427 -21.121,40.427 -21.167,40.418 -21.209,40.39 -21.237,40.348 -21.246,40.298 -21.246,32.808 -28.737,32.808 -28.787,32.798 -28.829,32.77 -28.857,32.728 -28.866,32.678 -28.866,-56.595 -28.857,-56.645 -28.829,-56.687 -28.787,-56.715 -28.737,-56.724 -21.246,-56.724 -21.246,-64.215 -21.237,-64.265 -21.209,-64.307 -21.167,-64.335 -21.16,-64.336 -24.931,-64.336 -24.939,-64.337 -24.939,-64.336 -25.062,-64.34 -25.334,-64.33 -25.604,-64.301 -25.872,-64.253 -26.136,-64.186 -26.394,-64.1 -26.645,-63.996 -26.888,-63.874 -27.122,-63.735 -27.345,-63.58 -27.557,-63.41 -27.756,-63.224 -27.941,-63.025 -28.112,-62.813 -28.267,-62.59 -28.406,-62.356 -28.528,-62.113 -28.632,-61.862 -28.718,-61.604 -28.785,-61.34 -28.833,-61.073 -28.862,-60.802 -28.872,-60.53 -28.868,-60.407 -28.869,-60.407 -28.868,-60.399 -28.868,36.49 -28.869,36.498 -28.868,36.498 -28.872,36.621 -28.862,36.893 -28.833,37.164 -28.785,37.431 -28.718,37.695 -28.632,37.953 -28.528,38.204 -28.406,38.447 -28.267,38.681 -28.112,38.904 -27.942,39.116 -27.756,39.315 -27.557,39.501 -27.345,39.671 -27.122,39.826 -26.888,39.965 -26.645,40.087 -26.394,40.191 -26.136,40.277 -25.872,40.344 -25.604,40.392 -25.334,40.421 -25.062,40.431

## Keep-outs
Keep-Out Layer:
  lines w0.254: -28.997,-60.401 -28.997,36.492 ; -28.997,-60.4 ccw(c-25.062,-60.53) -24.932,-64.465 ; -28.997,36.491 cw(c-25.062,36.621) -24.932,40.556 ; -24.933,-64.465 110.991,-64.465 ; -24.933,40.556 110.991,40.56 110.991,40.556 ; 110.989,-64.465 ccw(c111.12,-60.53) 115.055,-60.4 ; 110.989,40.556 cw(c111.12,36.621) 115.055,36.491 ; 115.055,-60.401 115.055,36.492

## Other copper
Top:
  pour cut-out: -15.799,-32.664 -15.799,-33.934 -13.259,-33.934 -13.259,-32.664 -13.259,-31.394 -14.529,-31.395 -15.215,-31.394 -15.799,-31.394 -15.799,-31.509 -15.799,-31.572 -15.799,-31.623
  pour cut-out: 102.464,24.892 102.464,23.622 105.004,23.622 105.003,24.892 105.004,26.162 103.733,26.162 103.048,26.162 102.464,26.162 102.464,26.048 102.464,25.984 102.464,25.933
Bottom:
  pour cut-out: -19.101,16.586 -19.101,15.316 -16.561,15.316 -16.561,16.586 -16.561,17.856 -17.831,17.856 -18.517,17.856 -19.101,17.856 -19.101,17.742 -19.101,17.678 -19.101,17.628
  pour cut-out: 87.02,-30.302 87.02,-31.572 89.56,-31.572 89.56,-30.302 89.56,-29.032 88.29,-29.032 87.605,-29.032 87.02,-29.032 87.02,-29.146 87.02,-29.21 87.02,-29.261
GND (plane layer: these items are gaps in the copper):
  lines w0.254: -29.124,-64.215 -29.124,40.683 114.807,40.683 114.807,17.141 107.187,17.141 107.187,9.521 114.807,9.521 114.807,-64.215 30.2,-64.215 9.682,-64.215 -29.124,-64.215
VCC (plane layer: these items are gaps in the copper):
  lines w0.254: -28.737,-56.595 -28.737,32.678 -21.117,32.678 -21.117,40.298 107.187,40.298 107.187,32.678 114.807,32.678 114.807,17.141 107.241,17.141 107.241,9.521 114.807,9.521 114.807,-56.595 107.187,-56.595 107.187,-64.176 28.289,-64.176 28.289,-56.672 10.311,-56.672 10.311,-64.215 -21.117,-64.215 -21.117,-56.595 -28.737,-56.595 ; -21.774,-46.662 15.483,-46.662 15.483,-51.764 19.76,-51.764 19.76,-46.552 64.206,-46.552 64.206,-52.397 94.564,-52.397 94.564,-62.067 105.275,-62.067 105.275,-46.529 70.703,-46.529 70.703,-38.458 -5.241,-38.458 -5.241,-2.658 15.184,-2.658 15.184,-8.81 89.334,-8.81 89.334,4.928 76.934,4.928 76.934,-2.578 54.871,-2.578 54.871,28.094 42.021,28.094 42.021,-0.754 29.723,-0.754 29.723,2.597 -17.971,2.597 -17.971,-8.8 -12.449,-8.8 -12.449,-38.331 -21.774,-38.331 -21.774,-46.662 ; 55.061,5.034 59.781,5.034 59.781,-1.45 66.337,-1.45 66.337,8.56 60.543,8.56 60.543,20.451 55.061,20.451 55.061,5.034

## Silkscreen, mask and mechanical layers (free items; w line width, h text height)
Silkscreen Top:
  drawing of 4150 lines, arcs and shapes, not listed
  text "IRDA" at 67.615,37.313 h1.27
  text "+3.3V" at 0.506,32.839 h0.64
  text "GND" at 5.693,32.714 h0.64
  text "COM" at -22.824,32.187 h3.81 r270
  text "CAMEAR" at 43.129,31.852 h3.81
  text "JTAG" at -9.195,31.547 h3.81
  text "SDIOWIFI" at 15.807,31.42 h3.81
  text "BUZER" at -14.415,23.613 h1.52
  text "+" at -6.528,23.393 h1
  text "-" at -2.083,23.368 h1
  text "TEMPERATURE SENSOR" at 26.492,22.758 h1.52
  text "RESET" at 107.036,18.009 h2.54
  text "ADC" at -12.979,11.278 h1.52
  text "LINE IN" at 95.58,6.223 h1.52
  text "USER IO" at -22.555,2.286 h3.81 r270
  text "BOOT SELECT" at -19.126,-0.076 h1.52
  text "MIC" at 98.183,-0.566 h1.52
  text "RTC POWER" at -20.107,-15.761 h1.52
  text "PHONE" at 95.682,-16.231 h1.52
  text "KEY" at -22.989,-27.288 h3.81 r270
  text "ETHERNET" at 85.395,-37.135 h1.52
  text "COM0" at 89.238,-51.265 h1.52
  text "POWER" at 95.606,-51.562 h1.52
  text "USB HOST" at -4.676,-51.59 h1.52
  text "GND" at 98.984,-53.848 h0.5
  text "LCD" at 29.794,-55.905 h1.52
  text "USB DEVICE" at 8.69,-56.418 h1.52
  text "+5V" at 99.035,-56.744 h0.5
  text "SWITCH" at 100.33,-57.937 h1.52

## Text inside footprints (layer, text, board x,y; h text height)
J1: Silkscreen Top "80" at 71.088,-32.031 h0.5; Silkscreen Top "70" at 71.088,-28.031 h0.5; Silkscreen Top "60" at 71.088,-24.031 h0.5; Silkscreen Top "50" at 71.088,-20.031 h0.5; Silkscreen Top "40" at 71.088,-16.031 h0.5; Silkscreen Top "30" at 71.088,-12.031 h0.5; Silkscreen Top "20" at 71.088,-8.031 h0.5; Silkscreen Top "10" at 71.088,-4.031 h0.5; Silkscreen Top "75" at 82.688,-30.431 h0.5; Silkscreen Top "65" at 82.688,-26.431 h0.5; Silkscreen Top "55" at 82.688,-22.431 h0.5; Silkscreen Top "45" at 82.688,-18.431 h0.5; Silkscreen Top "35" at 82.688,-14.431 h0.5; Silkscreen Top "25" at 82.688,-10.431 h0.5; Silkscreen Top "15" at 82.788,-6.431 h0.5; Silkscreen Top "5" at 82.988,-2.431 h0.5; Silkscreen Top "1" at 82.988,-0.831 h0.5
J2: Silkscreen Top "1" at 67.689,-42.731 h0.5 r270; Silkscreen Top "5" at 66.089,-42.731 h0.5 r270; Silkscreen Top "15" at 62.089,-42.531 h0.5 r270; Silkscreen Top "25" at 58.089,-42.431 h0.5 r270; Silkscreen Top "35" at 54.089,-42.431 h0.5 r270; Silkscreen Top "45" at 50.089,-42.431 h0.5 r270; Silkscreen Top "55" at 46.089,-42.431 h0.5 r270; Silkscreen Top "65" at 42.089,-42.431 h0.5 r270; Silkscreen Top "75" at 38.089,-42.431 h0.5 r270; Silkscreen Top "10" at 64.489,-30.831 h0.5 r270; Silkscreen Top "20" at 60.489,-30.831 h0.5 r270; Silkscreen Top "30" at 56.489,-30.831 h0.5 r270; Silkscreen Top "40" at 52.489,-30.831 h0.5 r270; Silkscreen Top "50" at 48.489,-30.831 h0.5 r270; Silkscreen Top "60" at 44.489,-30.831 h0.5 r270; Silkscreen Top "70" at 40.489,-30.831 h0.5 r270; Silkscreen Top "80" at 36.489,-30.831 h0.5 r270
J3: Silkscreen Top "80" at 32.689,-1.231 h0.5 r180; Silkscreen Top "70" at 32.689,-5.231 h0.5 r180; Silkscreen Top "60" at 32.689,-9.231 h0.5 r180; Silkscreen Top "50" at 32.689,-13.231 h0.5 r180; Silkscreen Top "40" at 32.689,-17.231 h0.5 r180; Silkscreen Top "30" at 32.689,-21.231 h0.5 r180; Silkscreen Top "20" at 32.689,-25.231 h0.5 r180; Silkscreen Top "10" at 32.689,-29.231 h0.5 r180; Silkscreen Top "75" at 21.089,-2.831 h0.5 r180; Silkscreen Top "65" at 21.089,-6.831 h0.5 r180; Silkscreen Top "55" at 21.089,-10.831 h0.5 r180; Silkscreen Top "45" at 21.089,-14.831 h0.5 r180; Silkscreen Top "35" at 21.089,-18.831 h0.5 r180; Silkscreen Top "25" at 21.089,-22.831 h0.5 r180; Silkscreen Top "15" at 20.989,-26.831 h0.5 r180; Silkscreen Top "5" at 20.789,-30.831 h0.5 r180; Silkscreen Top "1" at 20.789,-32.431 h0.5 r180
J4: Silkscreen Top "1" at 36.09,9.469 h0.5 r90; Silkscreen Top "5" at 37.69,9.469 h0.5 r90; Silkscreen Top "15" at 41.69,9.269 h0.5 r90; Silkscreen Top "25" at 45.69,9.169 h0.5 r90; Silkscreen Top "35" at 49.69,9.169 h0.5 r90; Silkscreen Top "45" at 53.69,9.169 h0.5 r90; Silkscreen Top "55" at 57.69,9.169 h0.5 r90; Silkscreen Top "65" at 61.69,9.169 h0.5 r90; Silkscreen Top "75" at 65.69,9.169 h0.5 r90; Silkscreen Top "10" at 39.29,-2.431 h0.5 r90; Silkscreen Top "20" at 43.29,-2.431 h0.5 r90; Silkscreen Top "30" at 47.29,-2.431 h0.5 r90; Silkscreen Top "40" at 51.29,-2.431 h0.5 r90; Silkscreen Top "50" at 55.29,-2.431 h0.5 r90; Silkscreen Top "60" at 59.29,-2.431 h0.5 r90; Silkscreen Top "70" at 63.29,-2.431 h0.5 r90; Silkscreen Top "80" at 67.29,-2.431 h0.5 r90